# Altium PCB Socket_Power.PcbDoc
Units mm, origin at the board's own origin, x right, y up, seen from the top; angles counter-clockwise.
Board outline 90 x 46.7 mm, 2 copper layers (Top Layer, Bottom Layer), stack 1.58 mm thick; 41 components, 26 nets, 127 pads, 19 vias.
Unrouted connection lines stored in the file: 11.
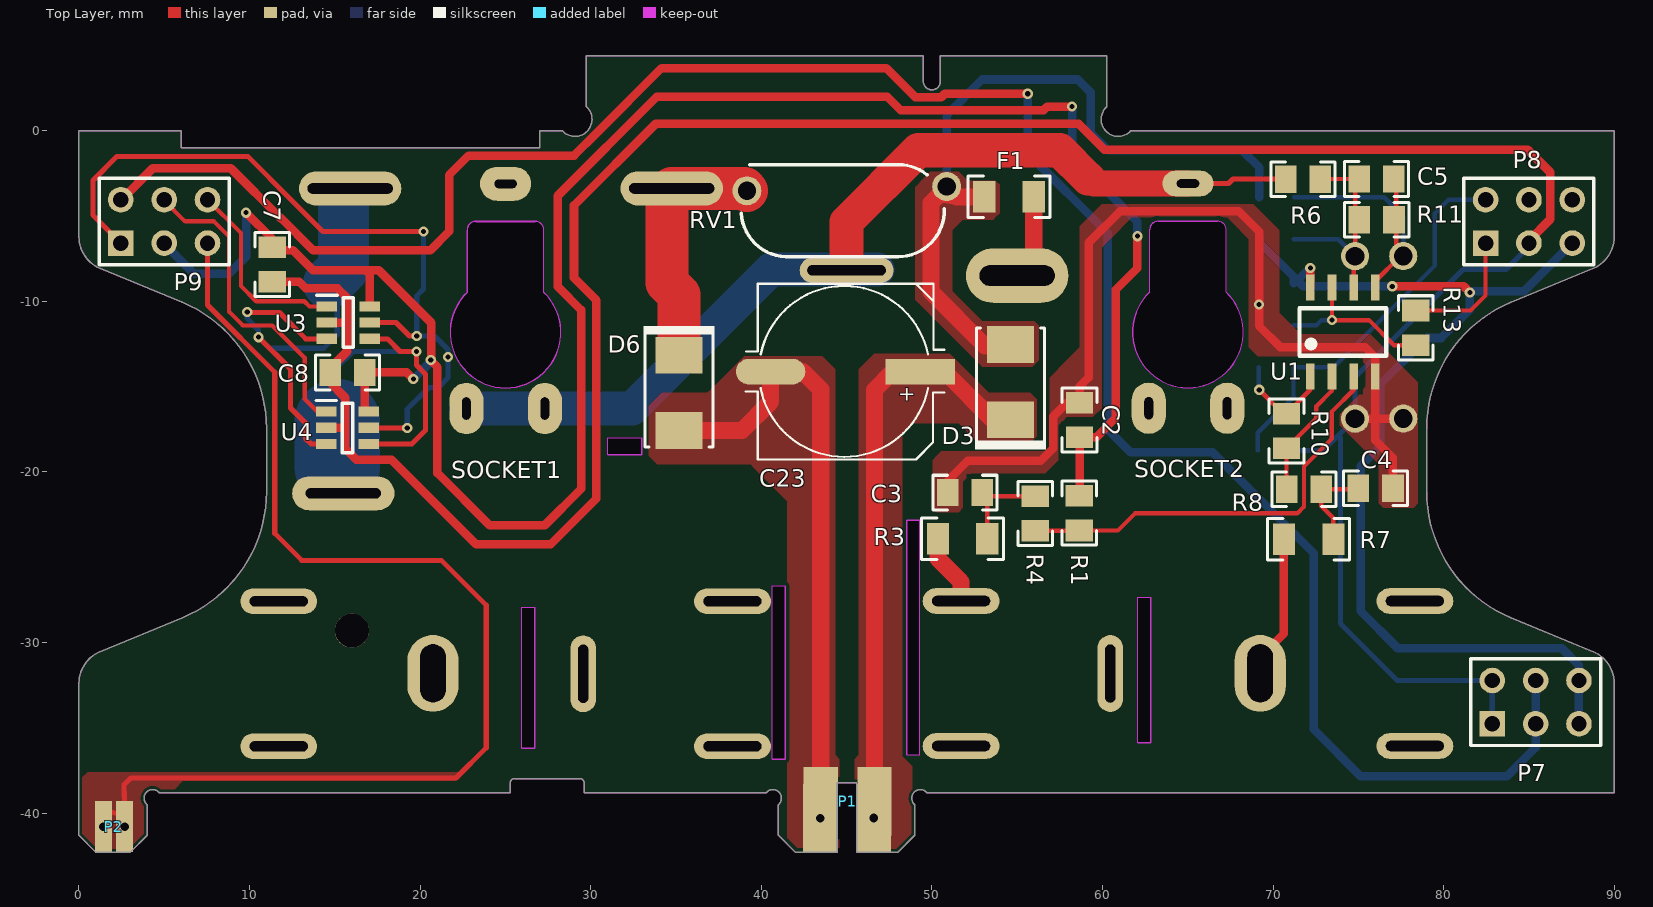
[diagram p0: Top Layer view]
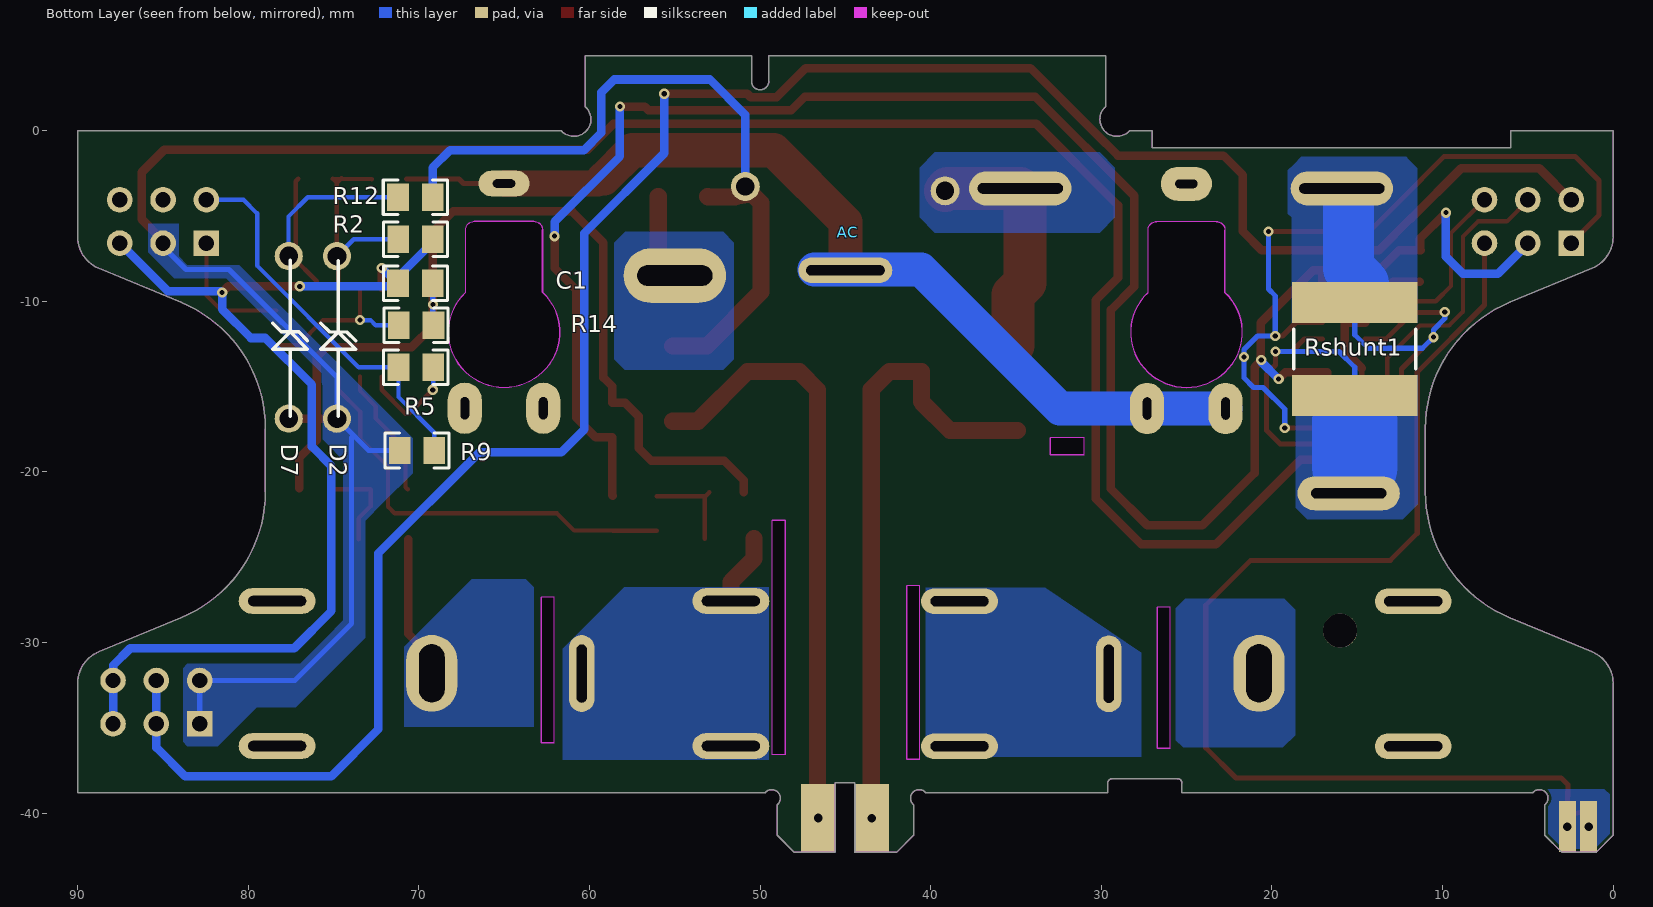
[diagram p1: Bottom Layer view, seen from below]

## Layer stack, top to bottom
Top Solder: solder mask 0.0102, Solder Resist, Dk 3.5
Top Layer: signal copper 0.0356
Dielectric 1: dielectric 1.5086, FR-4, Dk 4.8
Bottom Layer: signal copper 0.0356
Bottom Solder: solder mask 0.0102, Solder Resist, Dk 3.5

## Board outline
1,-42.3 0,-41.3 0,-32.386 cw(c2,-32.386) 1.235,-30.539 6.061,-28.539 ccw(c3,-21.148) 11,-21.148 11,-17.452 ccw(c3,-17.452) 6.061,-10.061 1.235,-8.061 cw(c2,-6.214) 0,-6.214 0,0 6,0 6,-1 27,-1 27,0 27.002,-0.002 28.335,-0.002 28.337,0 ccw(c29.078,0.672) 29.75,1.413 29.75,4.4 49.5,4.4 49.5,2.9 ccw(c50,2.9) 50.5,2.9 50.5,4.4 60.25,4.4 60.25,1.413 ccw(c60.922,0.672) 61.663,0 90,0 90,-6.214 cw(c88,-6.214) 88.765,-8.061 83.939,-10.061 ccw(c87,-17.452) 79,-17.452 79,-21.148 ccw(c87,-21.148) 83.939,-28.539 88.765,-30.539 cw(c88,-32.386) 90,-32.386 90,-38.8 49.704,-38.8 ccw(c49.318,-39.118) 49,-39.504 49,-41.3 48,-42.3 47.991,-42.291 45.593,-42.291 45.593,-38.227 44.45,-38.227 44.45,-42.291 44.441,-42.3 42,-42.3 41,-41.3 41,-39.504 ccw(c40.682,-39.118) 40.296,-38.8 29.625,-38.8 29.625,-38.25 ccw(c29.345,-38.25) 29.345,-37.97 25.555,-37.97 ccw(c25.555,-38.25) 25.275,-38.25 25.275,-38.8 4.704,-38.8 ccw(c4.318,-39.118) 4,-39.504 4,-41.3 3,-42.3
cut-out: 62.078,-35.865 62.078,-27.356 62.84,-27.356 62.84,-35.865
cut-out: 25.959,-36.195 25.959,-27.94 26.721,-27.94 26.721,-36.195
cut-out: 48.514,-36.576 49.276,-36.576 49.276,-22.835 48.514,-22.835
cut-out: 40.64,-36.83 40.64,-26.67 41.402,-26.67 41.402,-36.83
cut-out: 31,-19 31,-18 33,-18 33,-19
cut-out: 22.749,-9.456 ccw(c24.999,-11.802) 27.249,-9.456 27.249,-5.802 ccw(c26.749,-5.802) 26.749,-5.302 23.249,-5.302 ccw(c23.249,-5.802) 22.749,-5.802
cut-out: 62.749,-9.456 ccw(c64.999,-11.802) 67.249,-9.456 67.249,-5.802 ccw(c66.749,-5.802) 66.749,-5.302 63.249,-5.302 ccw(c63.249,-5.802) 62.749,-5.802

## Design rules (kind name [scope] priority, off if disabled: settings)
Clearance Clearance_1 [InNet('GND')] p1: gap=0.254
Clearance cutout [IsRegion] p2: gap=0.2
Clearance keepout [OnLayer('Keep-Out Layer')] p3: gap=0.2
Clearance [All] p4: gap=0.254
HoleSize [All] p1: absolutevalues=TRUE maxlimit=5 minlimit=0.01 maxpercent=80.000 minpercent=20.000
MinimumSolderMaskSliver [All] p1: minsoldermaskwidth=0.01
PolygonConnect [All] p1: connectstyle=Direct reliefconductorwidth=0.254 reliefentries=4 polygonreliefangle="90 Angle" airgapwidth=0.254
RoomDefinition socket_power_supply [InComponentClass('socket_power_supply')] p1: confinementstyle=ConfineIn formatcopy=TRUE lockcomponents=FALSE outline -46.21,-148.946 4.59,-148.946 4.59,-123.546 -46.21,-123.546
RoutingVias [All] p1: holewidth=0.3 width=0.6 viastyle="Through Hole" minholewidth=0.3 minwidth=0.6 maxholewidth=5 maxwidth=5
SilkToSilkClearance [All] p1: silktosilkclearance=0.1
SilkToSolderMaskClearance [IsPad] p1: minsilkscreentomaskgap=0.01 clearancetoexposedcopper=TRUE
SolderMaskExpansion [All] p1: expansion=0.102
Width [All] p1: maxlimit=5 minlimit=0.254 preferedwidth=0.254
26 further rules are at their usual default settings.

## Components (designator, comment, footprint, x,y, rotation, side; value= is the part's Value field where it differs from the comment)
AC "Header 3" CHAN3DONGTO 44.999,-8.182 r0 bottom locked
C1 "104" 0805_HV 70.206,-8.934 r0 bottom
C2 "104" 0805_HV 58.654,-16.956 r270 top
C3 "221" 0805_HV 51.943,-21.209 r0 top
C4 "221" 0805_HV 76.009,-20.959 r180 top
C5 "104" 0805_HV 76.064,-2.827 r180 top
C7 "104" 0805_HV 11.325,-7.841 r90 top
C8 "104" 0805_HV 15.746,-14.167 r0 top
C23 "400AX6R8M8x11" PANACAP-G-GENERIC 44.867,-14.115 r180 top locked
D2 "12V" "Diode Zener 1N5359B 5W 24V" 74.681,-12.05 r90 bottom
D3 "US1M-13-F" SMB 54.61,-14.732 r270 top
D6 "US1M-13-F" SMB 35.179,-15.367 r90 top
D7 "12V" "Diode Zener 1N5359B 5W 24V" 77.503,-12.042 r90 bottom
F1 "Res" 1206 54.52,-3.864 r180 top
P1 "Header 2" HDR1X2#1 46.105,-38.806 r180 top
P2 "Header 2" HDR1X2#2 3.563,-40.773 r180 top
P7 "Header 3X2" HDR2X3 82.849,-34.762 r0 top
P8 "Header 3X2" HDR2X3 82.457,-6.584 r0 top
P9 "Header 3X2" HDR2X3 2.459,-6.583 r0 top locked
R1 "22K" 0805_HV 58.636,-22.41 r90 top
R2 "100K" 0805_HV 70.199,-6.362 r180 bottom
R3 "2M" 1206 51.799,-23.907 r0 top
R4 "2.2K" 0805_HV 56.061,-22.436 r90 top
R5 "10K" 0805_HV 70.184,-13.869 r180 bottom
R6 "100K" 0805_HV 71.751,-2.833 r180 top
R7 "2M" 1206 72.084,-23.946 r0 top
R8 "2.2K" 0805_HV 71.81,-21.018 r0 top
R9 "10K" 0805_HV 70.116,-18.743 r0 bottom
R10 "22K" 0805_HV 70.783,-17.598 r270 top
R11 "10K" 0805_HV 76.074,-5.223 r180 top
R12 "220K" 0805_HV 70.211,-3.899 r0 bottom
R13 "10K" 0805_HV 78.371,-11.55 r270 top
R14 "10K" 0805_HV 70.163,-11.407 r180 bottom
Rshunt1 "0.006R" RESC2728 15.142,-12.792 r90 bottom locked
RV1 "S10K275E2" VAR_S10K275E2 44.721,-4.681 r0 top locked
SOCKET1 "Header 3" SOCKET 25.012,-3.111 r0 top locked
SOCKET2 "Header 3" socket 65.011,-3.094 r0 top locked
U1 "LM358 SOP8_MH" "SOP 8" 74.089,-11.796 r0 top
U3 "INA181A4IDBVT" SOT95P280X145-6N 15.789,-11.246 r0 top
U4 "INA181A1IDBVT" SOT95P280X145-6N 15.746,-17.413 r0 top
Wp1 "Socket" PIN1 35.568,-52.843 r0 top

## Footprints (in the part's own frame and the unit in brackets; to place one, negate y for a bottom-side part, rotate by r counter-clockwise, add the part's x,y. Pads: shape width x height; smd on the part's side, far side on the other; paste and mask are expansions set on the pad)
0805_HV [mil] "0805 with 30mil clearance between pads"
  rect 50x63 smd: 1(-40,0) 2(40,0)
  silkscreen extent -74,-40 74,40, body extent -43,-29 43,29, height 57
1206 [mm] "1206 from SM-752 data"
  rect 1.3x1.85 smd: 1(1.45,0) 2(-1.45,0)
  silkscreen extent -2.4,-1.21 2.4,1.21, body extent -1.7,-0.9 1.7,0.9, height 1.35
CHAN3DONGTO [mm]
  oval 5.5x1.5 hole 0.6 slot 4.6 at 0 deg: 1(-10.249,-4.802) 2(0,0)
  oval 6x3.2 hole 1.2 slot 4.4 at 0 deg: 3(10,0.306)
  body extent -13,-5.15 13,0.25, height 10.4
"Diode Zener 1N5359B 5W 24V" [mil]
  round 65 hole 43.31: 1(-190,5) 2(185,5)
  silkscreen extent -185,-38 175,42, body extent -210,-29 210,40, height 84
HDR1X2#1 [mm] "Connector; Header; 2 Position"
  rect 2x4 smd: 1(-0.526,0.499) 2(2.62,0.49)
HDR1X2#2 [mm] "Connector; Header; 2 Position"
  rect 1x3 hole 0.5: 1(0.884,0.017) 2(2.133,0.022)
HDR2X3 [mm] "Connector; Header; 3x2 Position"
  rect 1.5x1.5 hole 0.9: 1(0,0)
  round 1.5 hole 0.9: 2(0,2.54) 3(2.54,0) 4(2.54,2.54) 5(5.08,0) 6(5.08,2.54)
  silkscreen extent -1.27,-1.27 6.35,3.81
PANACAP-G-GENERIC [mil]
  rect 160x59.06 smd: 1(-175,0)
  oval 160x59.06 smd: 2(170,0)
  silkscreen extent -231,-203 227,203, body extent -233,-203 223,203, height 402
PIN1 [mm] "Connector; Plug"
RESC2728 [mm] "Chip Resistor, 2-Leads, Body 6.9x7.1mm, IPC Medium Density"
  rect 2.4x7.35 smd: 1(-2.725,0) 2(2.725,0)
  silkscreen extent -1.15,-3.58 1.15,3.57, body extent -3.55,-3.65 3.55,3.65, height 0.6
SMB [mm] "Molded Diode, 2-Leads, Body 5.4x3.6mm, IPC Medium Density, based on OnSemi component dimensions"
  rect 2.159x2.743 smd: 1(2.21,0) 2(-2.21,0)
  silkscreen extent -3.18,-2.08 3.94,2.08, body extent -2.7,-1.8 2.7,1.8, height 2.32
SOCKET [mm]
  oval 4.5x1.5 hole 0.6 slot 3.4 at 0 deg: 1(-13.3,-24.471) 1(-13.3,-32.971) 2(13.3,-32.971) 2(13.3,-24.471)
  oval 3x4.5 hole 1.5 slot 3.4 at 90 deg: 1(-4.258,-28.691)
  oval 1.5x4.5 hole 0.6 slot 3.4 at 90 deg: 2(4.55,-28.72)
  oval 2x3 hole 0.5 slot 1.3 at 90 deg: 3(-2.3,-13.17) 3(2.3,-13.17)
  oval 3x2 hole 0.5 slot 1.3 at 0 deg: 3(0,0.001)
  Keep-Out Layer lines w0.013: -2.25,-6.375 ccw(c0,-8.72) 2.25,-6.375 2.25,-2.72 ccw(c1.75,-2.72) 1.75,-2.22 -1.75,-2.22 ccw(c-1.75,-2.72) -2.25,-2.72 -2.25,-6.375
  body extent -14.74,-33.27 14.86,0.15, height 12.21
socket [mm]
  oval 4.5x1.5 hole 0.6 slot 3.4 at 0 deg: 1(-13.3,-24.471) 1(-13.3,-32.971) 2(13.3,-32.971) 2(13.3,-24.471)
  oval 1.5x4.5 hole 0.6 slot 3.4 at 90 deg: 1(-4.55,-28.72)
  oval 3x4.5 hole 1.5 slot 3.4 at 90 deg: 2(4.233,-28.708)
  oval 2x3 hole 0.5 slot 1.3 at 90 deg: 3(-2.3,-13.17) 3(2.3,-13.17)
  oval 3x1.5 hole 0.5 slot 1.3 at 0 deg: 3(0,0.001)
  Keep-Out Layer lines w0.013: -2.25,-6.375 ccw(c0,-8.72) 2.25,-6.375 2.25,-2.72 ccw(c1.75,-2.72) 1.75,-2.22 -1.75,-2.22 ccw(c-1.75,-2.72) -2.25,-2.72 -2.25,-6.375
  body extent -14.74,-33.27 14.86,0.15, height 12.21
"SOP 8" [mil]
  rect 20x60 smd: 1(-75,-102.5) 2(-25,-102.5) 3(25,-102.5) 4(75,-102.5) 5(75,102.5) 6(25,102.5) 7(-25,102.5) 8(-75,102.5)
  silkscreen extent -100,-55 100,55, body extent -98,-120 100,117, height 63
SOT95P280X145-6N [mm]
  rect 1.2x0.6 smd: 1(-1.25,0.95) 2(-1.25,0) 3(-1.25,-0.95) 4(1.25,-0.95) 5(1.25,0) 6(1.25,0.95)
  silkscreen extent -1.85,-1.45 0.3,1.6, body extent -1.4,-1.45 1.4,1.45, height 1.45
VAR_S10K275E2 [mm] "EPCOS"
  round 1.7 hole 1.067: 1(-5.567,1.164) 2(6.146,1.413)
  silkscreen extent -5.89,-2.7 6,2.7, body extent -5.02,-2.7 4.98,2.7, height 14

## Part data
AC SOCKET1 SOCKET2: "Header, 3-Pin"
C1 C2 C3 C4 C5 C7 C8: library part CM, "Cap SMD"
C23: "CAP, AL, 6.8uF, 400V, +/-20%, TH"
D2 D7: library part "Diode Zenner 1W 13V 1N4743 DIP_MH", "Diode Zenner 1W 13V 1N4743 DIP"
D3 D6: library part MURS160-13-F, "Diode, Ultrafast, 600V, 1A, SMB"
F1: library part Res-SMD, "Resistor"
P1 P2: "Header, 2-Pin"
P7 P8 P9: "Header, 3-Pin, Dual row"
R1 R2 R3 R4 R5 R6 R7 R8 R9 R10 R11 R12 R13 R14 Rshunt1: library part R, "Resistor 1/4W"
RV1: "Varistor 275V RMS 10MM Radial, TH"
U3 U4: library part INA181

## Free pads (board coordinates)
  oval 6x2 hole 0.6 slot 4.4 at 0 deg paste+0: 0(15.499,-21.252)
  oval 6x2 hole 0.6 slot 5 at 0 deg paste+0: 0(15.9,-3.381) 1(34.75,-3.38)
  round 2 hole 2 paste+0: 0(15.999,-29.302)
  rect 2x4 hole 0.5 paste+0: 1(43.445,-40.294) 2(46.596,-40.284)

## Via types
v1: diameter 0.6, hole 0.3, Top Layer to Bottom Layer, tented both sides, 19 vias

## Nets (pads, with @x,y where several pads share a name; then routed paths per layer and width w, separated by ;. In a path a pad name is that pad's centre, name@x,y a point inside that pad or via, vN(x,y) a via of type N, cw(c..) or ccw(c..) an arc to the next point about the centre after c; other vN are vias at no path point)
3.3V: C2.2 C7.2 C8.2 P9.3 R1.2 U3.6 U4.6 | length 128.4
  Top Layer w0.5: v1(9.8,-4.8) 11.318,-6.318 C7.2@11.318,-6.818 ; C7.2 C7.2@11.318,-6.818 ; U4.6 16.762,-16.229 C8.2 19.213,-14.167 v1(19.602,-14.556) ; U3.6 17.039,-8.4 16.813,-8.174 ; v1(58.22,1.421) 58.22,1.412 56.762,1.412 56.56,1.21 48.165,1.21 47.394,1.981 33.858,1.981 28.071,-3.806 28.071,-9.133 29.44,-10.502 29.44,-20.991 27.306,-23.125 24.077,-23.125 21.016,-20.064 21.016,-13.856 20.652,-13.492 20.652,-11.252 17.574,-8.174 16.813,-8.174 ; R1.2 58.654,-21.376 C2.2 59.634,-17.972 60.771,-16.835 60.771,-9.333 62.051,-8.053 v1(62.051,-6.176) ; C7.2@11.318,-6.818 11.318,-6.961 11.28,-6.999 12.54,-6.999 13.715,-8.174 16.813,-8.174
  Bottom Layer w0.5: P9.3 4.999,-6.631 6.75,-8.382 8.8,-8.382 9.8,-7.382 v1(9.8,-4.8) ; v1(19.602,-14.556) 19.607,-14.556 20.627,-13.536 v1(20.627,-13.429) ; v1(58.22,1.421) 58.22,-1.502 62.051,-5.333 v1(62.051,-6.176)
CURRENT_SIGNAL1: P9.6 U3.1 | length 11.4
  Top Layer w0.254: P9.6 7.543,-4.043 9.5,-6 9.5,-9.1 10.391,-9.991 13.211,-9.991 13.516,-10.296 U3.1
CURRENT_SIGNAL2: P9.4 U4.1 | length 18.7
  Top Layer w0.254: P9.4 4.999,-4.084 6.225,-5.31 7.913,-5.31 8.8,-6.197 8.8,-10.6 9.613,-11.413 11.338,-11.413 13.237,-13.312 13.237,-15.724 13.976,-16.463 U4.1
GND: C1.1 C2.1 C3.1 C4.1 C7.1 C8.1 D2.1 D7.1 P7.1 P7.2 P8.3 R9.2 R14.2 U1.4 U3.2 U4.2 | length 220.6
  Top Layer w0.3: C8.1@14.73,-14.764 C8.1 C8.1@14.73,-13.922 ; 15.572,-17.413 15.613,-17.372
  Top Layer w0.5: C7.1 12.924,-8.857 13.305,-9.238 15.159,-9.238 15.726,-9.805 15.726,-11.246 ; U4.2 15.572,-17.413 ; U3.2 15.726,-11.246 ; C8.1@14.73,-14.764 15.613,-15.647 15.613,-17.372 15.613,-18.622 16.272,-19.281 18.329,-19.281 23.294,-24.246 27.646,-24.246 30.336,-21.556 30.336,-9.932 29.021,-8.617 29.021,-4.38 33.811,0.41 58.596,0.41 60.118,-1.112 84.932,-1.112 86.251,-2.431 86.251,-5.189 84.997,-6.443 P8.3 ; C8.1@14.73,-13.922 15.726,-12.926 15.726,-11.246 ; C3.1@50.952,-21.195 50.952,-20.491 52.095,-19.348 56.37,-19.348 57.124,-18.594 57.124,-16.731 57.915,-15.94 C2.1 58.654,-14.99 59.182,-14.462 59.182,-6.562 61.018,-4.726 67.994,-4.726 69.18,-5.912 v1(69.18,-10.177) 69.18,-11.44 70.419,-12.679 75.387,-12.679 75.994,-13.286 U1.4 75.994,-16.876 ; D2.1 75.994,-16.876 ; C4.1 77.025,-19.18 75.994,-18.149 75.994,-16.876 ; D7.1 77.622,-16.876 75.994,-16.876
  Bottom Layer w0.3: R14.2 69.19,-11.364 C1.1 ; R9.2 72.941,-18.743 D2.1 74.808,-14.452 81.132,-8.128 83.651,-8.128 84.997,-6.782 P8.3 ; 73.941,-17.974 73.941,-28.888 77.275,-32.222 P7.2 P7.1
GND1: C23.2 D6.2 P1.2 pad.1@43.445,-40.294 | length 35.6
  Top Layer w1: D6.2@34.907,-17.564 38.863,-17.564 40.549,-15.878 C23.2 42.427,-14.115 43.485,-15.173 P1.2
GND_RL: P7.3 P7.4 P9.2 | length 130.3
  Top Layer w0.5: P9.2 2.49,-4.043 4.333,-2.2 8.9,-2.2 11.813,-5.113 11.842,-5.113 13.729,-7 20.6,-7 21.7,-5.9 21.7,-2.6 22.844,-1.456 29.027,-1.456 30.35,-0.133 30.35,-0.13 34.151,3.671 47.325,3.671 49.032,1.964 50.546,1.964 50.75,2.168 v1(55.622,2.168) ; 54.265,2.159 55.658,2.159 v1@55.661,2.156
  Bottom Layer w0.5: v1(55.622,2.168) 55.622,-1.317 60.3,-5.995 60.3,-17.5 61.646,-18.846 66.457,-18.846 72.39,-24.779 72.39,-35.094 75.141,-37.845 83.694,-37.845 85.389,-36.15 P7.3 P7.4
GROUND: AC.2 R6.2 SOCKET1.3 SOCKET2.3 | length 58.4
  Top Layer w0.3: SOCKET2.3@65.011,-3.093 67.392,-3.093 67.652,-2.833 R6.2
  Top Layer w1.5: 59.182,-2.794 59.481,-3.093 SOCKET2.3@65.011,-3.093
  Top Layer w2: AC.2@44.999,-7.916 44.999,-5.344 49.203,-1.14 57.495,-1.14 59.149,-2.794 59.182,-2.794
  Bottom Layer w2: SOCKET1.3@22.712,-16.281 27.312,-16.281 32.419,-16.281 40.572,-8.128 AC.2@46.812,-8.128
L: AC.1 D6.1 pad.0@15.9,-3.381 pad.1@34.75,-3.38 Rshunt1.2 RV1.1 U3.3 U4.3 | length 41
  Top Layer w0.3: v1@9.889,-10.582 9.959,-10.652 11.752,-10.652 13.296,-12.196 U3.3 ; v1(10.534,-12.097) 12.408,-13.971 12.408,-16.251 13.288,-17.131 13.288,-18.033 13.618,-18.363 U4.3
  Top Layer w2.5: pad.1@34.472,-4.211 34.472,-8.903 35.179,-9.61 D6.1@35.179,-12.573 ; AC.1 39.017,-3.38 RV1.1
  Bottom Layer w0.3: v1(9.867,-10.622) 9.867,-11.01 10.534,-11.677 v1(10.534,-12.097) 11.188,-12.751 14.351,-12.751 15.142,-11.96 Rshunt1.2
  Bottom Layer w3: Rshunt1.2@14.633,-8.947 15.508,-8.072 pad.0@15.508,-3.974
L1: R3.2 SOCKET1.2 SOCKET2.1 | length 4.2
  Top Layer w1: R3.2 50.349,-25.076 51.711,-26.438 SOCKET2.1@51.711,-27.565
LOUT: pad.0@15.499,-21.252 Rshunt1.1 U3.4 U4.4 | length 20.9
  Top Layer w0.3: U4.4 19.508,-18.363 20.306,-17.565 20.306,-14.257 19.783,-13.734 v1(19.783,-12.935) 18.826,-12.935 18.087,-12.196 U3.4
  Bottom Layer w0.3: Rshunt1.1 15.142,-13.858 16.065,-12.935 v1(19.783,-12.935)
  Bottom Layer w5: 15.142,-19.685 15.142,-17.043
N: AC.3 F1.2 R7.2 SOCKET1.1 SOCKET2.2 | length 13.5
  Top Layer w0.5: SOCKET2.2@69.244,-31.802 69.244,-30.865 70.634,-29.475 R7.2
  Top Layer w1: AC.3 55.97,-7.518 F1.2
NetC3_2: C3.2 R3.1 R4.2 | length 5.7
  Top Layer w0.254: C3.2@52.984,-21.195 C3.2@53.209,-21.42 ; R3.1 53.249,-21.46 C3.2@53.209,-21.42 ; R4.2 C3.2@53.209,-21.42
NetC4_2: C4.2 R7.1 R8.2 | length 5.4
  Top Layer w0.254: R7.1 73.534,-22.709 72.826,-22.001 R8.2 74.934,-21.018 C4.2
NetC5_1: C5.1 D7.2 R11.1 R12.2 U1.5 | length 16.4
  Top Layer w0.254: U1.5 75.994,-8.822 77.441,-7.375 77.216,-7.15 77.216,-2.959 C5.1@77.073,-2.816
  Bottom Layer w0.254: R12.2 76.518,-3.899 77.648,-5.029 77.648,-7.168 D7.2@77.441,-7.375
NetC5_2: C5.2 D2.2 R2.1 R6.1 R11.2 U1.6 | length 13.2
  Top Layer w0.254: R6.1 72.773,-2.827 C5.2@74.586,-2.827 ; C5.2@74.541,-2.782 C5.2@74.586,-2.827 ; U1.6 74.724,-7.435 D2.2 C5.2@74.808,-3.049 ; C5.2@75.041,-2.816 C5.2@75.03,-2.827 ; C5.2 C5.2@75.03,-2.827 ; C5.2@74.586,-2.827 C5.2@74.808,-3.049 ; C5.2@74.586,-2.827 C5.2@75.03,-2.827 ; C5.2@74.808,-3.049 C5.2@75.03,-2.827
  Bottom Layer w0.254: R2.1 73.819,-6.362 D2.2
NetR1_1: R1.1 R4.1 U1.3 | length 25.2
  Top Layer w0.254: R4.1 R1.1@58.636,-23.452 ; R1.1 60.902,-23.426 61.902,-22.426 71.414,-22.426 71.81,-22.03 71.81,-19.678 73.446,-18.042 73.446,-16.462 74.724,-15.184 U1.3
NetR8_1: R8.1 R10.2 U1.2 | length 7.7
  Top Layer w0.254: R8.1@70.656,-21.019 70.785,-20.89 R10.2@70.785,-18.729 ; R10.2 72.529,-16.868 72.529,-16.156 73.454,-15.231 U1.2
NetR13_2: R13.2 R14.1 U1.7 | length 9.8
  Top Layer w0.254: U1.7 v1(73.454,-11.098) 75.621,-11.098 77.089,-12.566 R13.2
  Bottom Layer w0.254: R14.1 72.532,-11.407 72.841,-11.098 v1(73.454,-11.098)
NN: D3.2 F1.1 R12.1 RV1.2 | length 45.1
  Top Layer w1: F1.1 53.063,-3.871 51.47,-3.871 50.773,-3.729 50.546,-3.683 50.867,-3.325 49.95,-4.242 49.95,-9.437 53.121,-12.608 D3.2@55.122,-12.608
  Bottom Layer w0.5: RV1.2@50.546,-3.683 RV1.2@50.574,-3.249 ; RV1.2 50.867,0.931 52.942,3.006 58.55,3.006 59.298,2.258 59.298,-0.11 60.327,-1.139 68.173,-1.139 69.195,-2.161 R12.1
RL1C: P2.1 P2.2 P9.5 | length 66.5
  Top Layer w0.3: P2.2@1.397,-39.878 1.404,-39.808 1.405,-39.803 1.539,-39.84 1.682,-39.879 2.561,-40.121 2.692,-40.157 2.684,-39.802 2.649,-38.331 3.044,-37.936 22.108,-37.936 23.876,-36.168 23.876,-27.813 21.242,-25.179 13.063,-25.179 11.481,-23.597 11.481,-14.157 7.539,-10.215 P9.5
V1: R5.2 R10.1 U1.1 | length 6.3
  Top Layer w0.254: v1(69.192,-15.186) 70.588,-16.582 R10.1 72.184,-15.181 U1.1
  Bottom Layer w0.254: R5.2 69.168,-15.162 v1(69.192,-15.186)
VCC_RELAY: C1.2 P7.5 P7.6 P8.5 R2.2 U1.8 | length 62.9
  Top Layer w0.5: v1(72.183,-8.038) 72.184,-8.039 U1.8 ; v1(76.987,-9.119) 81.178,-9.119 v1(81.534,-9.474)
  Bottom Layer w0.5: R2.2 69.183,-6.529 C1.2@71.222,-8.568 ; C1.2 C1.2@71.222,-8.568 ; v1(72.183,-8.038) C1.2@71.438,-8.784 ; v1(76.987,-9.119) 71.773,-9.119 C1.2@71.438,-8.784 ; P8.5 84.725,-9.396 81.612,-9.396 v1(81.534,-9.474) 81.534,-10.462 79.848,-12.147 79.005,-12.147 76.276,-14.876 76.276,-18.515 75.126,-19.665 75.126,-28.144 77.311,-30.329 86.92,-30.329 87.929,-31.338 P7.6 P7.5 ; C1.2@71.222,-8.568 C1.2@71.438,-8.784
VIN1: C23.1 D3.1 P1.1 pad.2 | length 34.3
  Top Layer w1: P1.1 46.631,-15.192 47.707,-14.116 C23.1 50.737,-14.115 53.65,-17.028 D3.1@55.122,-17.028
VOL_SIGNAL: P8.2 R5.1 R9.1 | length 22.9
  Bottom Layer w0.254: R9.1 69.1,-17.706 71.2,-15.606 R5.1 73.521,-13.869 79.485,-7.905 79.485,-4.843 80.284,-4.044 P8.2
VREF: P9.1 U3.5 U4.5 | length 45.9
  Top Layer w0.3: P9.1 0.821,-4.945 0.821,-2.913 2.234,-1.5 9.9,-1.5 12.496,-4.096 14.3,-5.9 v1(20.2,-5.9) ; U4.5 v1@19.25,-17.413 ; U3.5 18.593,-11.246 19.373,-12.026 v1(19.804,-12.026)
  Bottom Layer w0.3: v1(19.25,-17.427) 19.25,-16.31 20.519,-15.041 21.082,-15.041 21.639,-14.484 v1(21.639,-13.266) 21.639,-12.822 20.843,-12.026 v1(19.804,-12.026) 19.804,-9.675 20.2,-9.279 v1(20.2,-5.9)
WRONG_WIRE: P8.1 R13.1 | length 7.5
  Top Layer w0.254: R13.1 81.566,-10.534 82.448,-9.652 82.448,-6.593 P8.1
pads on no net: P8.4 P8.6

## Polygon pours and split planes (outlines as drawn)
no net on Bottom Solder "Bottom Layer-No Net" (solid): 40.004,-27.2 35.675,-27.2 31.674,-29.935 31.674,-36.4 39.98,-36.4
LOUT on Bottom Solder "Bottom Layer-No Net" (solid): 11.354,-14.732 11.354,-16.662 11.786,-17.094 12.395,-17.704 12.395,-21.438 12.395,-22.149 12.802,-22.555 12.827,-22.581 17.78,-22.581 17.882,-22.581 18.466,-21.996 18.593,-21.869 18.593,-20.574 18.593,-16.789 18.796,-16.586 18.72,-16.51 18.72,-14.783 18.491,-14.554 16.104,-14.554
L on Bottom Solder "Bottom Layer-No Net" (solid): 12.065,-2.413 12.065,-10.063 14.287,-9.995 14.338,-10.046 16.751,-10.046 17.754,-10.046 18.6,-9.2 18.6,-4.463 18.923,-4.14 18.923,-2.413
N on Bottom Solder "Bottom Layer-No Net" (solid): 51.867,-8.255 51.867,-12.319 51.867,-13.233 52.451,-13.818 57.455,-13.818 58.09,-13.183 58.09,-7.823 51.968,-7.823 51.892,-7.899
N on Bottom Solder "Bottom Layer-No Net" (solid): 70.841,-32.791 63.525,-32.791 63.271,-32.537 63.271,-26.746 63.729,-26.289 66.904,-26.289 67.005,-26.391 70.866,-30.251 70.866,-31.318
N on Bottom Solder "Bottom Layer-No Net" (solid): 20.574,-27.686 20.574,-29.515 20.574,-33.223 20.574,-34.315 20.701,-34.442 25.425,-34.442 25.425,-28.6 24.511,-27.686
L1 on Bottom Solder "Bottom Layer-No Net" (solid): 49.759,-27.076 49.759,-32.055 52.883,-32.055 54.178,-32.055 55.372,-33.249 56.134,-34.011 56.134,-36.5 61.198,-36.5 61.198,-30.817 57.457,-27.076
RL1C on Bottom Layer "Bottom Layer-No Net" (solid, remove dead copper, pour order 13): 0,-41.3 0.991,-42.291 2.982,-42.291 4,-41.273 4,-39.521 3.958,-39.479 3.958,-39.424 3.847,-39.313 3.828,-39.294 3.828,-39.021 3.828,-38.601 0.508,-38.601 0,-39.109
LOUT on Bottom Layer "Bottom Layer-No Net" (solid, remove dead copper, pour order 45): 11.455,-14.3 11.455,-21.895 12.268,-22.708 12.319,-22.758 16.281,-22.758 17.932,-22.758 18.339,-22.352 18.593,-22.098 18.593,-18.618 18.593,-14.326
N on Bottom Layer "Bottom Layer-No Net" (solid, remove dead copper, pour order 36): 51.537,-6.553 51.537,-13.386 52.146,-13.995 57.937,-13.995 58.496,-13.437 58.547,-13.386 58.547,-8.052 58.547,-6.553 57.912,-5.918 52.172,-5.918
N on Bottom Layer "Bottom Layer-No Net" (solid, remove dead copper, pour order 33): 63.271,-26.746 63.271,-27.559 63.271,-29.921 63.271,-34.925 70.866,-34.925 70.866,-30.251 66.904,-26.289 65.151,-26.289 63.729,-26.289
N on Bottom Layer "Bottom Layer-No Net" (solid, remove dead copper, pour order 30): 18.644,-28.08 18.644,-35.42 19.355,-36.131 25.21,-36.131 25.629,-35.712 25.629,-27.991 25.082,-27.445 19.279,-27.445
L1 on Bottom Layer "Bottom Layer-No Net" (solid, remove dead copper, pour order 26): 49.479,-26.757 57.952,-26.757 61.57,-30.375 61.57,-36.862 49.479,-36.862
L1 on Bottom Layer "Bottom Layer-No Net" (solid, remove dead copper, pour order 22): 40.294,-26.797 33.299,-26.797 27.658,-30.602 27.658,-31.521 27.658,-36.7 40.294,-36.7
GND on Bottom Layer "Bottom Layer-No Net" (solid, remove dead copper, pour order 9): 83.82,-35.814 83.82,-31.75 83.82,-31.496 83.566,-31.242 81.28,-31.242 76.962,-31.242 75.438,-29.718 74.422,-28.702 74.422,-25.654 74.422,-19.304 75.438,-18.288 75.692,-18.034 75.692,-16.51 75.692,-14.224 77.216,-12.7 81.28,-8.636 83.566,-8.636 84.328,-8.636 85.852,-7.112 85.852,-5.461 84.074,-5.461 84.074,-7.112 84.074,-7.366 83.566,-7.874 81.534,-7.874 80.518,-7.874 78.486,-9.906 70.358,-18.034 70.358,-20.066 72.136,-21.844 73.152,-22.86 73.152,-28.194 73.152,-29.718 75.692,-32.258 77.216,-33.782 79.248,-33.782 79.502,-33.782 81.534,-35.814 81.788,-36.068 82.804,-36.068 83.566,-36.068
L on Bottom Layer "Bottom Layer-No Net" (solid, remove dead copper, pour order 12): 29.21,-2.159 29.21,-5.08 30.099,-5.969 39.751,-5.969 40.64,-5.08 40.64,-2.159 39.751,-1.27 30.099,-1.27
L on Bottom Layer "Bottom Layer-No Net" (solid, pour order 24): 11.475,-9.376 11.475,-7.725 11.475,-2.187 12.007,-1.655 12.129,-1.533 14.393,-1.533 18.284,-1.533 18.704,-1.953 19.057,-2.306 19.057,-3.648 19.057,-4.854 18.833,-5.078 18.833,-8.535 18.833,-11.264 18.809,-11.24 11.492,-11.24
NN on Top Layer "Bottom Layer-No Net" (solid, remove dead copper, pour order 20): 55.88,-13.843 52.959,-13.843 51.816,-12.7 49.022,-9.906 49.022,-6.096 49.022,-3.302 49.53,-2.794 49.911,-2.413 50.927,-2.413 51.562,-2.413 51.943,-2.794 52.07,-2.921 53.721,-2.921 53.975,-3.175 53.975,-4.064 53.975,-4.826 53.721,-5.08 53.594,-5.207 52.324,-5.207 51.816,-5.207 51.435,-5.588 51.181,-5.842 51.181,-7.747 51.181,-9.398 52.197,-10.414 52.959,-11.176 55.88,-11.176 56.007,-11.176 56.261,-11.43 56.261,-13.462 55.88,-13.843
VIN1 on Top Layer "Bottom Layer-No Net" (solid, remove dead copper, pour order 18): 45.72,-42.3 45.72,-37.48 45.72,-33.401 45.72,-13.97 46.482,-13.208 46.609,-13.081 48.26,-13.081 51.054,-13.081 51.943,-13.97 53.34,-15.367 55.245,-15.367 55.753,-15.367 56.134,-15.748 56.134,-16.764 56.134,-17.907 55.88,-18.161 54.737,-18.161 52.578,-18.161 51.562,-17.145 50.419,-17.145 48.895,-17.145 48.387,-17.653 48.26,-17.78 48.26,-22.733 48.26,-36.66 48.847,-37.247 48.847,-38.923 48.768,-39.116 48.847,-39.36 48.979,-39.491 48.993,-41.296 47.989,-42.3
GND on Top Layer "Bottom Layer-No Net" (solid, remove dead copper, pour order 16): 33.401,-19.05 33.401,-16.256 33.401,-16.129 33.909,-15.621 34.163,-15.367 36.576,-15.367 36.83,-15.367 37.084,-15.113 38.989,-13.208 40.005,-13.208 43.561,-13.208 44.196,-13.843 44.323,-13.97 44.323,-20.193 44.323,-36.576 44.577,-36.83 44.577,-37.338 44.577,-42.281 44.562,-42.296 42.014,-42.296 41.529,-41.811 41.529,-39.878 41.529,-39.497 41.529,-39.116 41.529,-21.717 39.624,-19.812 39.37,-19.558 35.941,-19.558 33.909,-19.558
GND on Top Layer "Bottom Layer-No Net" (solid, remove dead copper, pour order 10): 50.038,-22.098 50.038,-20.574 50.038,-19.812 50.038,-19.304 50.292,-19.05 50.546,-18.796 52.832,-18.796 56.642,-18.796 56.896,-18.542 56.896,-17.526 56.896,-14.478 57.912,-13.462 58.674,-12.7 58.674,-8.382 58.674,-5.588 59.182,-5.08 59.944,-4.318 61.214,-4.318 68.834,-4.318 69.596,-5.08 70.358,-5.842 70.358,-9.144 70.358,-10.668 71.12,-11.43 71.628,-11.938 73.66,-11.938 75.692,-11.938 76.454,-12.7 78.486,-14.732 78.486,-17.526 78.486,-21.844 78.232,-22.098 76.708,-22.098 76.454,-22.098 76.2,-21.844 76.2,-19.812 76.2,-19.558 75.184,-18.542 73.914,-17.272 73.914,-16.764 73.914,-16.51 74.422,-16.002 75.438,-14.986 75.438,-13.716 74.93,-13.208 70.866,-13.208 69.088,-13.208 68.834,-12.954 68.58,-12.7 68.58,-11.176 68.58,-6.35 67.564,-5.334 67.31,-5.08 65.786,-5.08 61.722,-5.08 60.452,-6.35 59.944,-6.858 59.944,-9.652 59.944,-16.256 59.436,-16.764 57.912,-16.764 57.658,-17.018 57.404,-17.272 57.404,-19.05 57.404,-19.304 56.642,-20.066 54.61,-20.066 52.324,-20.066 52.07,-20.32 51.816,-20.574 51.816,-21.336 51.816,-22.098 51.562,-22.352 50.292,-22.352
RL1C on Top Layer "Bottom Layer-No Net" (solid, remove dead copper, pour order 11): 22.198,-37.846 22.352,-37.692 22.252,-37.592 21.336,-37.592 0.508,-37.592 0,-38.1 0,-38.862 0,-41.3 0.997,-42.297 2.984,-42.297 4,-41.281 4,-39.512 3.979,-39.491 3.979,-39.472 3.902,-39.396 3.847,-39.341 3.847,-38.923 4.123,-38.647 4.143,-38.628 4.416,-38.628 4.535,-38.628 4.706,-38.798 5.332,-38.798 5.396,-38.8 6.096,-38.1 21.336,-38.1 22.098,-38.1 22.352,-37.846 22.352,-37.692

## Keep-outs
Keep-Out Layer:
  lines w0.01: 25.959,-36.195 25.959,-27.94 26.721,-27.94 26.721,-36.195 25.959,-36.195 ; 40.64,-36.83 41.402,-36.83 41.402,-26.67 40.64,-26.67 40.64,-36.83 ; 48.514,-36.576 48.514,-22.835 49.276,-22.835 49.276,-36.576 48.514,-36.576 ; 62.078,-35.865 62.84,-35.865 62.84,-27.356 62.078,-27.356 62.078,-35.865
  lines w0.013: 28.335,-0.002 27.002,-0.002 27,0 27,-1 6,-1 6,0 0,0 ; 28.337,0 ccw(c29.078,0.672) 29.75,1.413 29.75,4.4 49.5,4.4 49.5,2.9 ccw(c50,2.9) 50.5,2.9 50.5,4.4 60.25,4.4 60.25,1.413 ccw(c60.922,0.672) 61.663,0 90,0 90,-6.214 cw(c88,-6.214) 88.765,-8.061 83.939,-10.061 ccw(c87,-17.452) 79,-17.452 79,-21.148 ccw(c87,-21.148) 83.939,-28.539 88.765,-30.539 cw(c88,-32.386) 90,-32.386 90,-38.8 49.704,-38.8 ccw(c49.318,-39.118) 49,-39.504 49,-41.3 48,-42.3 47.991,-42.291 45.593,-42.291 45.593,-38.227 44.45,-38.227 44.45,-42.291 44.441,-42.3 42,-42.3 41,-41.3 41,-39.504 ccw(c40.682,-39.118) 40.296,-38.8 29.625,-38.8 29.625,-38.25 ccw(c29.345,-38.25) 29.345,-37.97 25.555,-37.97 ccw(c25.555,-38.25) 25.275,-38.25 25.275,-38.8 4.704,-38.8 ccw(c4.318,-39.118) 4,-39.504 4,-41.3 3,-42.3 1,-42.3 0,-41.3 0,-32.386 cw(c2,-32.386) 1.235,-30.539 6.061,-28.539 ccw(c3,-21.148) 11,-21.148 11,-17.452 ccw(c3,-17.452) 6.061,-10.061 1.235,-8.061 cw(c2,-6.214) 0,-6.214 0,0 ; 0,0 0,0 ; 31,-19 31,-18 33,-18 33,-19 31,-19

## Other copper
Top Layer:
  pour cut-out: 31,-19 31,-18 33,-18 33,-19

## Silkscreen, mask and mechanical layers (free items; w line width, h text height)
Bottom Solder:
  lines w0.013: 0,0 6,0 6,-1 27,-1 27,0 28.337,0 ; 45.593,-42.3 48,-42.3 48.006,-42.294
Mechanical 5:
  circle w0.013: c-6.895,44.909 r0.45
  circle w0.013: c-1.815,44.909 r0.45
  circle w0.013: c-4.355,44.909 r0.45
  circle w0.013: c-1.815,47.449 r0.45
  circle w0.013: c-4.355,47.449 r0.45
  circle w0.013: c-6.895,47.449 r0.45
  circle w0.013: c-6.912,44.888 r0.45
  circle w0.013: c-1.832,44.888 r0.45
  circle w0.013: c-4.372,44.888 r0.45
  circle w0.013: c-1.832,47.428 r0.45
  circle w0.013: c-4.372,47.428 r0.45
  circle w0.013: c-6.912,47.428 r0.45
  lines w0.013: 18.678,7.968 18.678,19.761 cw(c19.178,19.761) 18.824,20.115 19.531,20.822 cw(c19.885,20.468) 19.885,20.968 51.371,20.968 cw(c51.371,20.468) 51.724,20.822 52.431,20.115 cw(c52.078,19.761) 52.578,19.761 52.578,7.968 ; 33.528,25.268 37.728,25.268 37.728,27.768 33.528,27.768 33.528,25.268
Mechanical 13:
  drawing of 1020 lines, arcs and shapes, not listed

## Text inside footprints (layer, text, board x,y; h text height)
C23: Top Overlay "+" at 49.067,-15.09 h0.89 r180